# Altium PCB MCPS Power 030524.PcbDoc
Units mm, origin at the board's own origin, x right, y up, seen from the top; angles counter-clockwise.
Board outline 218.19 x 125.73 mm, 2 copper layers (Top Layer, Bottom Layer); 86 components, 40 nets, 182 pads, 14 vias.
Unrouted connection lines stored in the file: 1.
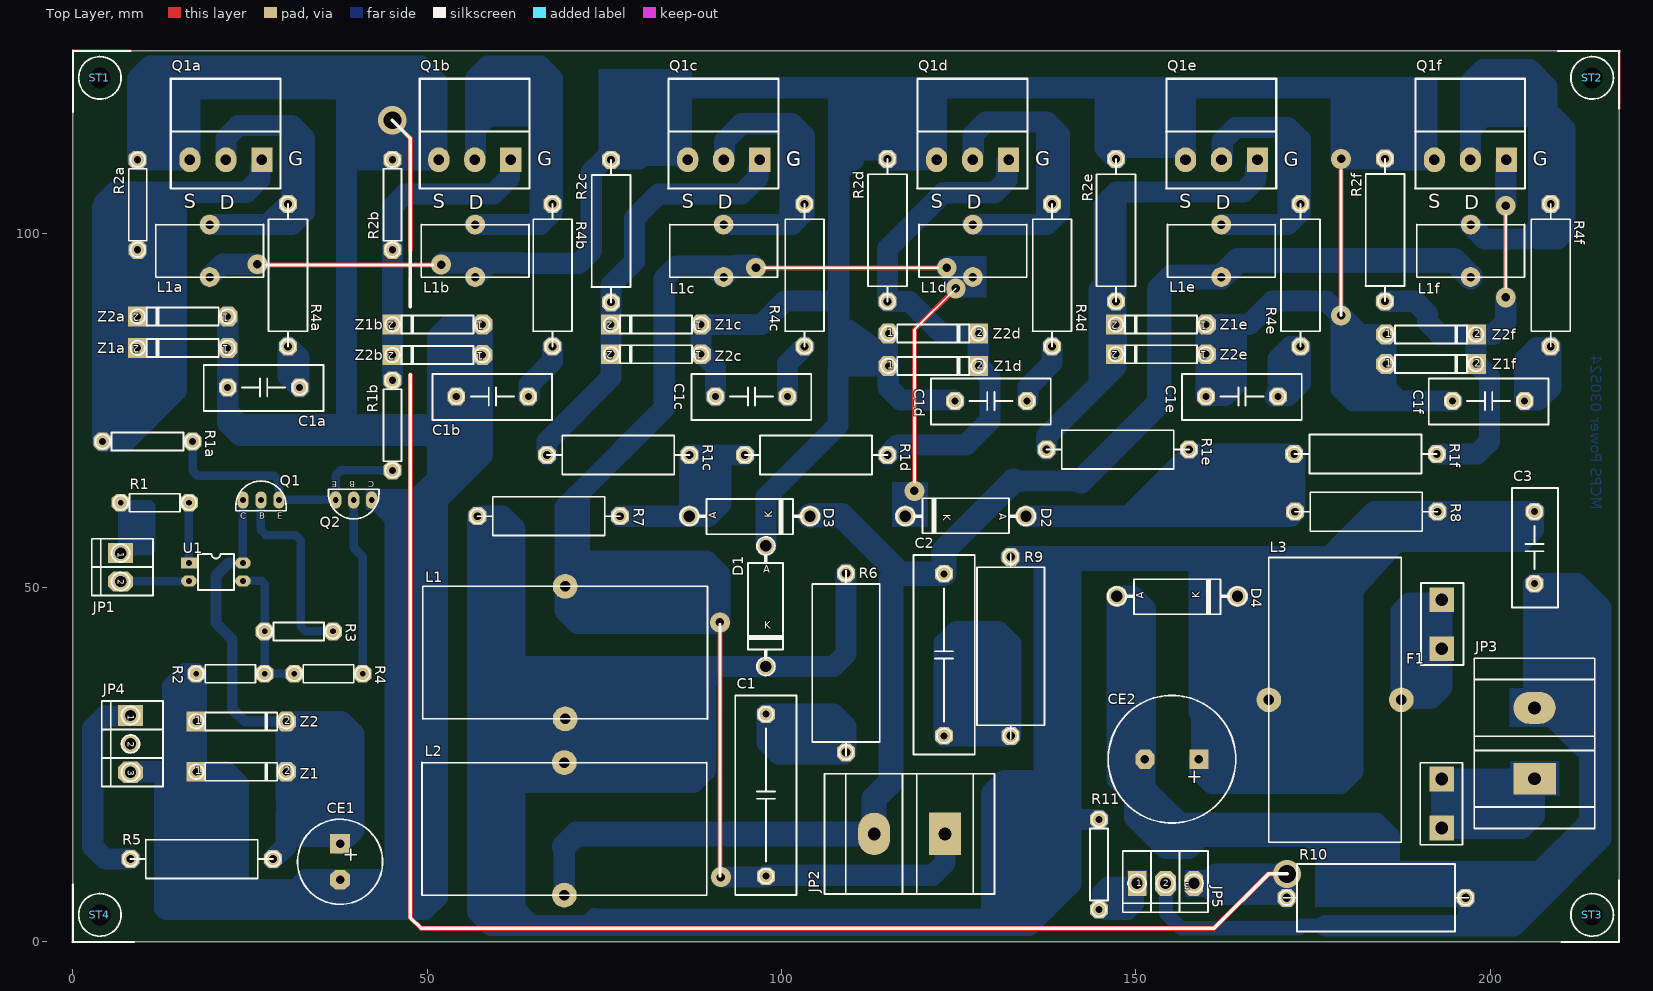
[diagram p0: Top Layer view]
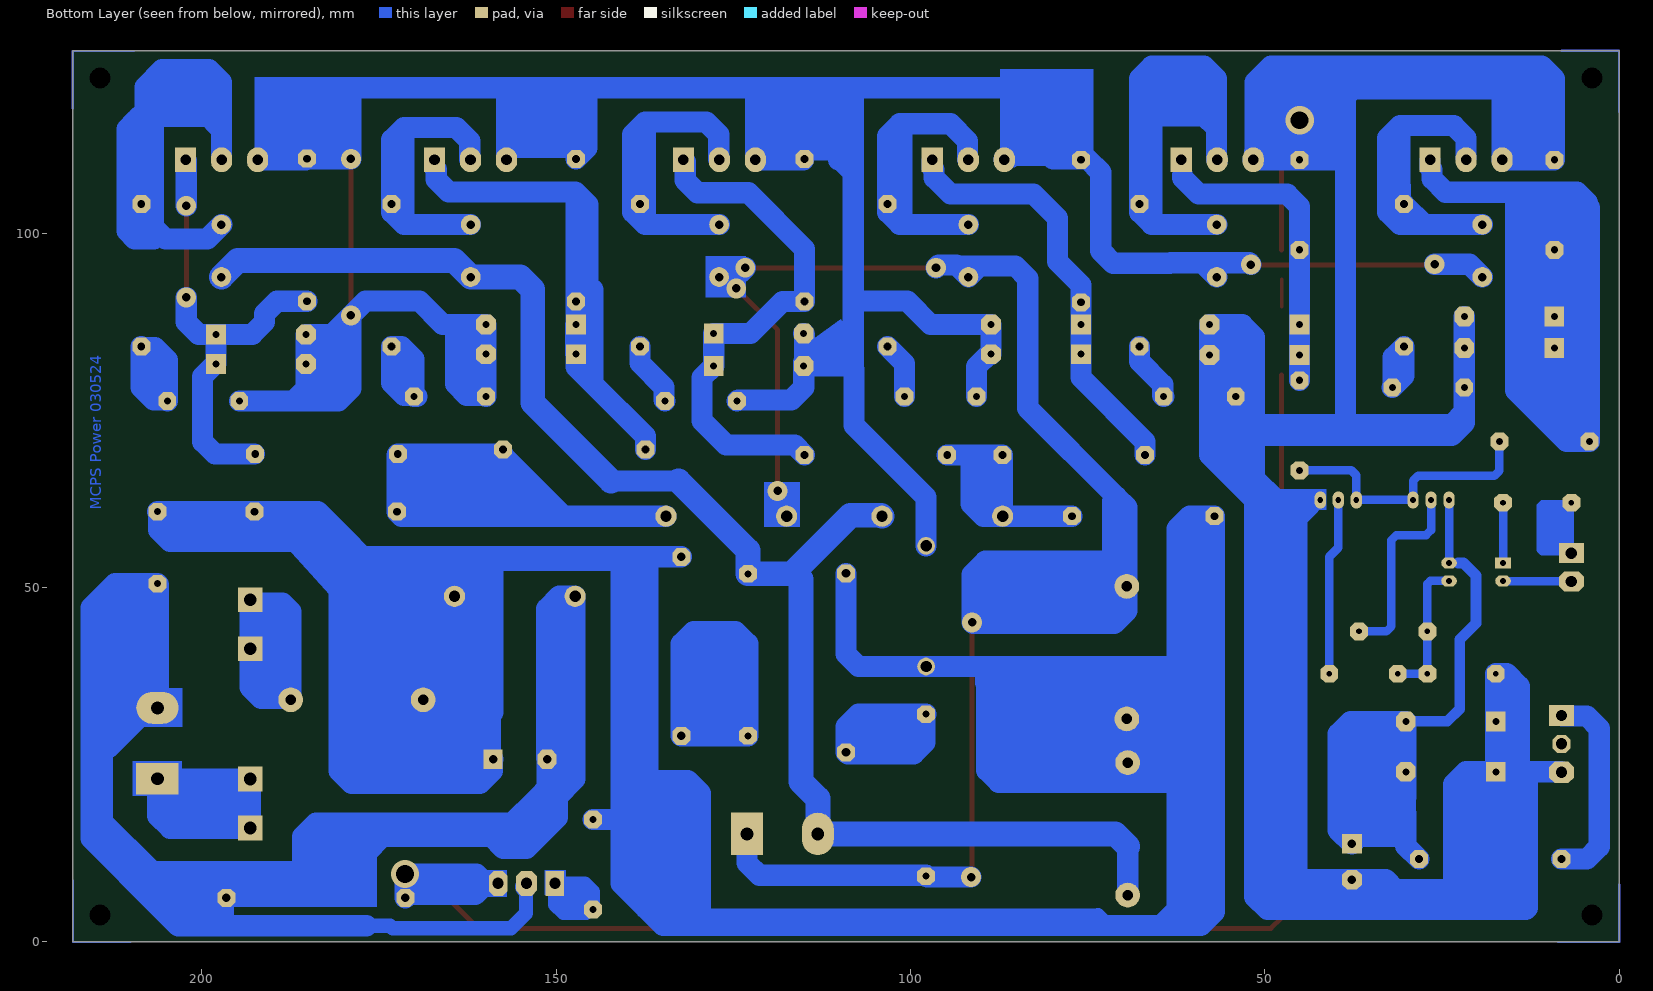
[diagram p1: Bottom Layer view, seen from below]

## Layer stack, top to bottom
Top Solder: solder mask 0.0102, Solder Resist, Dk 3.5
Top Layer: signal copper 0.0356
Dielectric1: dielectric 0.32, FR-4, Dk 4.8
Bottom Layer: signal copper 0.0356
Bottom Solder: solder mask 0.0102, Solder Resist, Dk 3.5

## Board outline
0.013,0 0.013,125.73 218.199,125.73 218.199,0

## Design rules (kind name [scope] priority, off if disabled: settings)
Clearance [All] p1: gap=0.3 ignorepadtopadclearanceinfootprint=FALSE except(1.3: Arc-Arc Arc-Track Track-Track)
ComponentClearance [All] p1 off: gap=0.254 collisioncheckmode=3 verticalgap=0.254 showdistances=FALSE
PolygonConnect [All] p1: connectstyle=Direct reliefconductorwidth=1 reliefentries=4 polygonreliefangle="90 Angle" airgapwidth=0.3
RoutingVias [All] p1: holewidth=0.711 width=1.27 viastyle="Through Hole" minholewidth=0.711 minwidth=1.27 maxholewidth=0.711 maxwidth=1.27
SilkToSolderMaskClearance SilkscreenOverComponentPads [IsPad] p1: minsilkscreentomaskgap=0.254 clearancetoexposedcopper=TRUE
SolderMaskExpansion [All] p1: expansion=0.102 istentingtop=FALSE
UnRoutedNet [All] p1: checkbadconnections=TRUE
Width [All] p1: maxlimit=5 minlimit=0.3 preferedwidth=0.7 minimp=50.000000 maximp=50.000000 favimp=50.000000
27 further rules are at their usual default settings.

## Components (designator, comment, footprint, x,y, rotation, side; value= is the part's Value field where it differs from the comment)
C1 "100N/1K" C100N 97.803,20.701 r0 top locked
C1a "220N/400" C4P 26.937,78.232 r270 top locked
C1b "220N/400" C4P 59.195,76.962 r270 top locked
C1c "4N7/1K" C4P 95.771,76.962 r270 top locked
C1d "4N7/1K" C4P 129.553,76.327 r270 top locked
C1e "4N7/1K" C4P 164.986,76.962 r270 top locked
C1f "4N7/1K" C4P 199.784,76.327 r270 top locked
C2 "100N/1K" C100N 122.949,40.513 r180 top locked
C3 "100N/400" C4P 206.261,55.626 r0 top locked
CE1 "470M/25" cap2p12 37.744,13.843 r0 top
CE2 "100M/400" CAP3P5 158.763,25.781 r270 top locked
D1 "UF5408" D54#1 97.803,55.88 r0 top locked
D2 "UF5408" D54#2 134.506,60.071 r270 top locked
D3 "UF5408" D54#2 87.008,60.071 r90 top locked
D4 "UF5408" D54#2 147.333,48.768 r90 top locked
F1 "5A" FL 193.18,48.288 r270 top locked
JP1 "TRIG In" DSIP2 6.744,54.864 r270 top locked
JP2 "LC Out" DG55X2 123.076,15.24 r180 top locked
JP3 "DC In" DG55X2 206.261,23.02 r90 top locked
JP4 "DC IN" DSIP3#1 8.141,31.953 r0 top locked
JP5 "ISense" DSIP3#2 150.177,8.255 r90 top locked
L1 "180uH/5A" L20MHGREEN 69.482,50.165 r270 top locked
L1a "2uH/5A" LS_GREEN 19.317,101.219 r270 top locked
L1b "2uH/5A" LS_GREEN 56.782,101.219 r270 top locked
L1c "2uH/5A" LS_GREEN 91.834,101.219 r270 top locked
L1d "2uH/5A" LS_GREEN 127.013,101.219 r270 top locked
L1e "2uH/5A" LS_GREEN 162.065,101.219 r270 top locked
L1f "2uH/5A" LS_GREEN 197.244,101.219 r270 top locked
L2 "180uH/5A" L20MHGREEN 69.355,6.604 r90 top locked
L3 "20mH/5A" L20MHGREEN 187.465,34.163 r180 top locked
Q1 "BC337" CBE-BC546 29.096,62.357 r90 top locked
Q1a "" 3EDG-STR 26.708,110.388 r0 top locked
Q1b "" 3EDG-STR 61.831,110.388 r0 top locked
Q1c "" 3EDG-STR 96.954,110.388 r0 top locked
Q1d "" 3EDG-STR 132.077,110.388 r0 top locked
Q1e "" 3EDG-STR 167.201,110.388 r0 top locked
Q1f "" 3EDG-STR 202.324,110.388 r0 top locked
Q2 "BC327" CBE-BC546 37.097,62.357 r270 top locked
R1 "270R" W1/4 6.744,61.976 r0 top locked
R1a "470R" R5P 16.904,70.612 r180 top locked
R1b "470R" R5P 45.098,66.548 r90 top locked
R1c "3K3/2W" R2W 76.975,68.707 r180 top locked
R1d "3K3/2W" R2W 104.889,68.707 r0 top locked
R1e "3K3/2W" R2W 147.46,69.469 r180 top locked
R1f "3K3/2W" R2W 182.41,68.834 r0 top locked
R2 "3K3" W1/4 27.064,37.846 r180 top locked
R2a "10K" R5P 9.157,110.363 r270 top locked
R2b "10K" R5P 45.098,110.363 r270 top locked
R2c "560R/2W" R2W 75.959,100.305 r270 top locked
R2d "560R/2W" R2W 114.948,100.432 r270 top locked
R2e "560R/2W" R2W 147.206,100.432 r270 top locked
R2f "560R/2W" R2W 185.179,100.457 r270 top locked
R3 "100R" W1/4 27.064,43.815 r0 top locked
R4 "100R" W1/4 31.255,37.846 r0 top locked
R4a "22R2W" R2W 30.366,94.082 r270 top locked
R4b "22R/2W" R2W 67.704,94.082 r270 top locked
R4c "220R/2W" R2W 103.264,94.082 r270 top locked
R4d "220R/2W" R2W 138.189,94.082 r270 top locked
R4e "220R/2W" R2W 173.241,94.082 r270 top locked
R4f "220R/2W" R2W 208.547,94.082 r270 top locked
R5 "1K/2W" R2W 18.199,11.684 r180 top locked
R6 "100R/5W" R5W 109.106,39.37 r270 top locked
R7 "220R/2W" R2W 67.17,60.071 r0 top locked
R8 "220R/2W" R2W 182.512,60.706 r180 top locked
R9 "100R/5W" R5W 132.347,41.707 r270 top locked
R10 "10mR/5W" R5W 183.909,6.223 r180 top locked
R11 "1K%" R5P 144.793,4.572 r90 top locked
ST1 "STUD" CORNER 0.013,125.73 r0 top locked
ST2 "STUD" CORNER 218.199,125.73 r270 top locked
ST3 "STUD" CORNER 218.199,0 r180 top locked
ST4 "STUD" CORNER 0.013,0 r90 top locked
U1 "PC817" DIP4 16.396,53.467 r0 top locked
Z1 "16V" D5P#1 17.412,24.003 r90 top locked
Z1a "16V" D5P#2 21.857,83.82 r270 top locked
Z1b "16V" D5P#2 57.798,87.122 r270 top locked
Z1c "16V" D5P#2 88.659,87.122 r270 top locked
Z1d "16V" D5P#2 115.075,81.28 r90 top locked
Z1e "16V" D5P#2 159.906,87.122 r270 top locked
Z1f "16V" D5P#2 185.306,81.534 r90 top locked
Z2 "16V" D5P#1 17.412,31.115 r90 top locked
Z2a "16V" D5P#2 21.857,88.265 r270 top locked
Z2b "16V" D5P#2 57.798,82.804 r270 top locked
Z2c "16V" D5P#2 88.659,82.931 r270 top locked
Z2d "16V" D5P#2 115.075,85.852 r90 top locked
Z2e "16V" D5P#2 159.906,82.931 r270 top locked
Z2f "16V" D5P#2 185.306,85.725 r90 top locked

## Footprints (in the part's own frame and the unit in brackets; to place one, negate y for a bottom-side part, rotate by r counter-clockwise, add the part's x,y. Pads: shape width x height; smd on the part's side, far side on the other; paste and mask are expansions set on the pad)
3EDG-STR [mm]
  rect 3x3.5 hole 1.5: 1(-0.025,-0.025)
  oval 3x3.5 hole 1.5: 2(-5.105,-0.025) 3(-10.185,-0.025)
  silkscreen extent -12.93,-4.09 2.62,11.41
C4P [mm]
  oct 2.5x2.5 hole 1: 1(0,5.08) 2(0,-5.08)
  silkscreen extent -3.19,-8.46 3.33,8.44
C100N [mm]
  oct 2.5x2.5 hole 1: 1(0,11.43) 2(0,-11.43)
  silkscreen extent -4.32,-14.07 4.32,14.07
cap2p12 [mm]
  rect 2.8x2.8 hole 1.2: 1(-0.025,0)
  oct 2.8x2.8 hole 1.2: 2(-0.025,-5.08)
  silkscreen extent -6.02,-8.54 5.97,3.46
CAP3P5 [mm]
  rect 2.7x2.7 hole 1.2: 1(0,0.152)
  oct 2.7x2.7 hole 1.2: 2(0,-7.468)
  silkscreen extent -9,-12.66 9,5.34
CBE-BC546 [mm]
  oval 2.4x1.6 hole 0.8: 1(0,2.54) 2(0,0) 3(0,5.08)
  silkscreen extent -1.52,-1.02 2.67,6.1
CORNER [mm]
  round 2 hole 3: 1(3.81,-3.81)
  Multi-Layer lines w0.3: 0,-8.623 0,0.013 8.09,0.013
  silkscreen extent 0,-8.62 8.09,0.01
D5P#1 [mil]
  rect 110x110 hole 39.37: 1(0,0)
  oct 110x110 hole 39.37: 2(0,-500)
  silkscreen extent -50,-540 50,40
D5P#2 [mil]
  oct 110x110 hole 39.37: 1(0,0)
  rect 110x110 hole 39.37: 2(0,-500)
  silkscreen extent -50,-540 50,40
D54#1 [mm]
  round 2.5 hole 1.6: 1(0,0) 2(0,-17.018)
  silkscreen extent -2.54,-18.29 2.41,1.27
D54#2 [mm]
  round 3 hole 1.6: 1(0,0) 2(0,-17.018)
  silkscreen extent -2.54,-18.28 2.41,1.27
DG55X2 [mm]
  rect 4.5x6 hole 1.8: 1(0,0)
  oval 4.5x6 hole 1.8: 2(10,0)
  silkscreen extent -7,-8.5 17,8.5
DIP4 [mm]
  rect 2.2x1.6 hole 0.8: 1(0,0)
  oval 2.2x1.6 hole 0.8: 2(0,-2.54) 3(7.62,-2.54) 4(7.62,0)
  silkscreen extent 1.27,-3.81 6.35,1.27
DSIP2 [mm]
  rect 2.8x3.5 hole 1.6: 1(0,0)
  oct 2.8x3.5 hole 1.6: 2(4.013,0)
  silkscreen extent -2.03,-4.06 5.99,4.57
DSIP3#1 [mm]
  rect 3.5x3 hole 1.6: 1(0,0)
  oct 2.5x2.5 hole 1.6: 2(0,-4.013)
  oct 3.5x3 hole 1.6: 3(0,-8.026)
  silkscreen extent -4.06,-10.01 4.57,2.03
DSIP3#2 [mm]
  rect 3.5x2.6 hole 1.6: 1(0,0)
  oct 3.5x3 hole 1.6: 2(0,-4.013)
  oct 3.5x2.6 hole 1.6: 3(0,-8.026)
  silkscreen extent -4.06,-10.01 4.57,2.03
FL [mm]
  rect 3.5x3.5 hole 1.8: 1(0,0) 2(32.233,0) ""(6.932,0) ""(25.301,0)
  silkscreen extent -2.34,-3.05 34.57,3.05
L20MHGREEN [mm]
  round 3.5 hole 1.5: 1(18.7,0) 2(0,0)
  silkscreen extent 0,-20.1 18.7,20.1
LS_GREEN [mm]
  round 2.8 hole 1.2: 1(7.4,0) 2(0,0)
  silkscreen extent 0,-7.6 7.4,7.6
R2W [mm]
  oct 2.54x2.54 hole 1.1: 1(-10.058,0) 2(10.058,0)
  silkscreen extent -11.07,-2.75 11.07,2.76
R5P [mm]
  oct 2.54x2.54 hole 1: 1(0,0) 2(12.7,0)
  silkscreen extent -1.02,-1.27 13.71,1.27
R5W [mm]
  oct 2.54x2.54 hole 1.2: 1(-12.624,0) 2(12.624,0)
  silkscreen extent -13.64,-4.75 13.64,4.75
W1/4 [mm]
  oct 2.5x2.5 hole 0.8: 1(0,0) 2(9.652,0)
  silkscreen extent -1.01,-1.27 10.67,1.27

## Part data
C1 C1a C1b C1c C1d C1e C1f C2 C3: library part C
CE1 CE2: library part E
D1 D2 D3 D4: library part D
F1: library part FUSE1
JP1 JP2 JP3: library part "Header 2", "Header, 2-Pin", LatestRevisionDate=17-Jul-2002, LatestRevisionNote="Re-released for DXP Platform.", Publisher="Altium Limited"
JP4 JP5: library part "Header 3", "Header, 3-Pin", LatestRevisionDate=17-Jul-2002, LatestRevisionNote="Re-released for DXP Platform.", Publisher="Altium Limited"
L1 L1a L1b L1c L1d L1e L1f L2 L3: library part INDUCTOR
Q1: library part BC546
Q1a Q1b Q1c Q1d Q1e Q1f: library part "MOSFET N"
Q2: library part M6, "PNP", DatasheetVersion=1997, LatestRevisionDate=15-Jan-2003, LatestRevisionNote="PCB Footprint 'BCY-W3/D4.7' replaced", PackageDescription="TO, Flat Index; 3 In-Line, Axial Leads; Body Dia. 4.5mm; Leads 0.51 x 0.48 mm (max)", PackageReference=TO-92A, PackageVersion=Sep-1998, Published=8-Jun-2000, Publisher="Altium Limited"
R1 R1a R1b R1c R1d R1e R1f R2 R2a R2b R2c R2d R2e R2f R3 R4 R4a R4b R4c R4d R4e R4f R5 R6 R7 R8 R9 R10 R11: library part R
U1: library part OPTODIP4
Z1 Z1a Z1b Z1c Z1d Z1e Z1f Z2 Z2a Z2b Z2c Z2d Z2e Z2f: library part DZ

## Via types
v1: diameter 2.8, hole 1.2, Top Layer to Bottom Layer, 12 vias
v2: diameter 4, hole 2.5, Top Layer to Bottom Layer, 2 vias

## Nets (pads, with @x,y where several pads share a name; then routed paths per layer and width w, separated by ;. In a path a pad name is that pad's centre, name@x,y a point inside that pad or via, vN(x,y) a via of type N, cw(c..) or ccw(c..) an arc to the next point about the centre after c; other vN are vias at no path point)
16V: CE1.1 Q1.3 R5.1 U1.4 Z1.2 Z2.2 | length 103.8
  Bottom Layer w1.2: U1.4 Q1.3
  Bottom Layer w1.5: 22.746,53.467 21.963,53.467 20.206,51.71 20.206,44.958 22.492,42.672 22.492,32.872 24.249,31.115 Z2.2
  Bottom Layer w3: R5.1 30.112,13.538 30.112,16.007 30.112,18.161 ; 30.112,14.859 36.703,14.859 CE1.1 39.637,15.761 39.637,16.912 ; 39.637,16.912 39.637,29.358 37.879,31.115 Z2.2 Z1.2 30.112,20.426 31.869,18.669 37.879,18.669 39.637,16.912
COM: C3.2 CE2.2 D4.1 JP3.2 JP5.2 R10.1 | length 398.9
  Bottom Layer w2: JP5.2@154.278,7.789 154.278,4.043 156.399,1.923 173.066,1.923 173.429,2.286 176.784,2.286
  Bottom Layer w3: 152.654,20.179 152.654,20.32 ; JP5.2 154.191,7.876 JP5.2@154.278,7.789 ; 176.784,2.286 203.34,2.286 207.277,6.223 ; 185.293,9.906 180.299,9.906 176.784,6.391 176.784,12.573 174.498,14.859 159.131,14.859 ; 185.801,10.414 185.801,14.859 183.896,16.764 156.21,16.764 152.654,20.32 ; 186.179,9.02 187.066,9.906 207.01,9.906 ; R10.1 207.277,6.223 ; 209.944,9.906 207.01,9.906 ; 147.333,27.538 147.333,22.987 149.86,20.46 149.86,17.539 154.191,13.208 ; 147.333,27.538 149.09,25.781 CE2.2 ; 147.333,27.538 147.333,36.83 ; 147.333,36.83 151.319,32.844 ; 147.333,36.83 D4.1 149.562,48.768 151.319,47.011 151.319,32.844 ; CE2.2 151.295,21.679 152.654,20.32 ; CE2.2 151.295,25.864 151.319,25.888 151.319,32.844 ; 154.191,13.208 157.48,13.208 159.131,14.859 ; 154.191,13.208 155.842,14.859 159.131,14.859 ; JP3.2 211.468,33.02 214.008,30.48 ; JP3.2 207.531,33.02 213.119,27.432 214.008,27.432 ; JP3.2 206.134,33.147 206.134,50.419 C3.2 212.25,50.546 214.008,48.789 ; 207.01,9.906 214.008,16.904 ; 207.277,6.223 214.008,12.954 ; 214.008,12.954 214.008,16.904 ; 214.008,12.954 215.646,14.592 215.646,47.15 214.008,48.789 ; 214.008,16.904 214.008,27.432 ; 214.008,27.432 214.008,30.48 ; 214.008,30.48 214.008,48.789
DRN2: C1.2 D2.2 JP2.1 L1.2 L1c.1 L1d.1 | length 264.7
  Top Layer w0.7: v1(91.326,45.085) 91.326,9.271 v1(91.453,9.144) ; v1(96.406,95.123) v1(123.33,95.123) ; v1(118.758,63.627) 118.758,86.36 v1(124.6,92.202)
  Bottom Layer w3: v1(91.453,9.144) 97.652,9.144 97.803,9.295 97.803,9.398 121.318,9.398 123.076,11.155 JP2.1@123.076,12.573 ; v1(96.406,95.123) 96.014,95.514 93.529,95.514 93.392,95.377 ; v1(123.33,95.123) 125.054,93.399 126.592,93.399 L1d.1 ; 69.482,53.721 71.514,53.721 ; 69.482,53.721 L1.2 69.482,46.736 71.26,44.958 91.199,44.958 v1(91.326,45.085) 91.326,51.837 89.441,53.721 71.514,53.721 ; 69.482,53.721 69.482,61.341 70.942,62.801 ; 70.942,62.801 71.514,62.23 71.514,53.721 ; 70.942,62.801 83.452,75.311 83.452,93.62 85.209,95.377 90.276,95.377 ; 90.276,95.377 93.392,95.377 ; 90.276,95.377 L1c.1 93.392,95.377
DRN3: C2.2 D3.2 JP2.2 L1e.1 L1f.1 L2.2 | length 217.1
  Bottom Layer w3: L2.2 69.355,13.483 ; 132.728,65.024 142.253,65.024
  Bottom Layer w3.5: 69.355,13.483 71.112,15.24 JP2.2 113.076,20.239 115.456,22.619 115.456,51.181 116.218,51.943 C2.2 122.949,55.245 132.728,65.024 ; D3.2 104.153,60.198 108.471,60.198 116.726,51.943 ; 142.253,65.024 153.302,76.073 153.302,92.062 155.059,93.819 L1e.1 164.385,96.139 194.924,96.139 L1f.1
GND: C1a.2 C1b.2 CE1.2 JP4.3 JP5.3 Q1a.3 Q1b.3 Q2.3 R2.2 R2a.1 R2b.1 R10.2 Z1.1 Z1a.1 Z1b.1 Z2.1 Z2a.1 Z2b.1 | length 899.3
  Top Layer w0.7: v2(45.098,115.951) 47.625,113.424 47.625,97.663 ; 47.625,80.01 47.625,3.429 49.149,1.905 161.036,1.905 168.719,9.588 v2(171.336,9.588)
  Bottom Layer w1.2: Q2.3 45.479,62.357
  Bottom Layer w2.5: JP5.3@158.38,8.255 159.906,8.255 166.002,8.255 166.435,7.822
  Bottom Layer w3: JP4.3 8.217,24.003 14.364,24.003 ; Q1a.3 Q1a.3@16.523,110.594 ; 18.315,123.098 16.523,121.306 16.523,120.396 ; 19.939,6.731 20.592,7.384 23.381,7.384 ; Z2a.1 Z1a.1 C1a.2 21.857,74.782 ; 38.159,119.807 38.748,120.396 ; 38.621,119.761 38.621,110.363 ; 38.748,119.507 51.011,119.507 ; 43.701,61.595 45.479,59.817 ; 45.479,62.357 45.479,59.817 ; 46.431,62.42 48.463,62.42 51.448,65.405 ; 48.654,62.357 51.448,62.357 ; 51.223,119.295 51.392,119.126 ; Q1b.3@51.493,110.49 51.454,110.529 51.454,111.486 51.392,111.549 51.392,119.126 ; Q1b.3 R2b.1 38.621,110.363 ; C1b.2 54.115,73.025 ; C1b.2@54.266,77.113 56.04,77.113 57.798,78.87 ; 167.526,6.731 161.43,6.731 159.906,8.255 161.239,9.588 v2(171.336,9.588) 171.285,9.538 R10.2 ; 167.872,6.731 R10.2@170.777,6.731 ; 14.364,24.003 Z1.1 ; 14.364,24.003 12.967,22.606 12.967,4.774 13.169,4.572 19.169,4.572 ; 14.364,24.003 14.122,24.245 14.122,36.089 15.879,37.846 R2.2 Z2.1 Z1.1 ; Q1a.3@16.523,110.594 16.292,110.363 R2a.1 9.157,121.814 10.914,123.571 38.748,123.571 ; Q1a.3@16.523,110.594 16.523,120.396 ; 16.523,120.396 38.748,120.396 ; Z1.1 17.412,6.329 19.169,4.572 ; Z1.1 21.623,24.003 23.381,22.246 23.381,7.384 ; 19.169,4.572 23.381,4.572 ; 21.857,74.782 23.614,73.025 38.621,73.025 ; 21.857,74.782 21.857,73.258 23.614,71.501 50.711,71.501 ; 23.381,4.572 23.381,7.384 ; 23.381,4.572 43.721,4.572 ; 23.381,7.384 31.568,7.384 32.947,8.763 CE1.2 44.971,8.763 45.479,9.271 ; 38.621,73.025 38.621,110.363 ; 38.621,73.025 51.448,73.025 ; 38.748,120.396 38.748,123.571 ; 38.748,123.571 49.126,123.571 51.392,121.306 51.392,119.126 ; 43.721,4.572 45.479,6.329 45.479,9.271 ; 43.721,4.572 49.636,4.572 51.448,6.384 51.448,62.357 ; 45.479,9.271 45.479,59.817 ; 50.711,71.501 50.711,72.289 51.448,73.025 ; 50.711,71.501 51.448,71.501 ; 51.448,62.357 51.448,65.405 ; 51.448,62.357 54.115,65.024 ; 51.448,65.405 51.448,71.501 ; 51.448,71.501 54.115,71.501 ; 51.448,71.501 51.448,73.025 ; 51.448,73.025 51.448,85.365 53.205,87.122 Z1b.1 Z2b.1 57.798,78.87 ; 51.448,73.025 54.115,73.025 ; 54.115,65.024 57.798,68.707 57.798,78.87 ; 54.115,65.024 54.115,71.501 ; 54.115,71.501 54.115,73.025
GT1: Q1.2 Q2.2 R1a.1 R1b.1 | length 39.4
  Bottom Layer w1.2: R1a.1 16.904,66.489 17.614,65.779 28.386,65.779 29.096,65.069 Q1.2 Q2.2 37.097,65.845 37.8,66.548 R1b.1
GT2: D3.1 R1c.1 R1d.1 R7.2 | length 38.3
  Bottom Layer w3: R7.2 D3.1 ; R1d.1 91.453,68.707 ; D3.1 89.695,60.071 91.453,61.828 91.453,68.707 ; D3.1 87.008,68.682 R1c.1 91.453,68.707
GT3: D2.1 R1e.1 R1f.1 R8.2 | length 72.9
  Bottom Layer w3: D2.1 148.984,60.071 ; R1e.1@157.518,68.605 153.157,64.244 148.984,60.071 ; R1e.1@157.518,68.834 R1f.1 172.479,68.707 172.479,61.214 R8.2@172.428,61.163 ; R8.2 171.818,60.071 154.324,60.071 148.984,60.071
HV: C3.1 CE2.1 D1.2 D4.2 L1.1 L2.1 L3.1 R6.1 R7.1 R8.1 R9.1 R11.2 | length 736.9
  Bottom Layer w2: 72.04,2.304 73.546,3.81
  Bottom Layer w3: 60.592,22.987 61.1,22.479 62.37,22.479 ; L1.1 L1.1@69.418,31.401 ; R6.1 109.106,40.619 107.348,38.862 D1.2 89.421,38.862 ; R9.1 137.097,54.331 ; R11.2 140.856,17.272 ; CE2.1 CE2.1@158.966,25.73 ; 158.915,32.406 158.915,54.102 ; 177.051,52.602 177.051,54.115 177.267,54.331 ; 177.051,54.331 162.593,54.331 ; 57.112,24.638 57.778,25.304 59.639,25.304 62.37,25.304 ; 57.112,24.638 R7.1 60.612,60.071 62.37,58.314 62.37,38.862 ; 57.112,24.638 57.112,4.242 59.05,2.304 64.617,2.304 ; 62.37,22.479 87.536,22.479 89.294,24.236 89.294,36.449 89.421,36.576 89.421,38.862 ; 62.37,22.479 62.37,25.304 ; 62.37,22.479 62.37,4.551 64.617,2.304 ; 62.37,25.304 62.37,31.242 ; 62.37,25.304 L2.1 69.418,25.368 L1.1@69.418,31.401 ; 62.37,31.242 68.552,31.242 68.583,31.274 69.29,31.274 L1.1@69.418,31.401 ; 62.37,31.242 62.37,38.862 ; 62.37,38.862 89.421,38.862 ; 64.617,2.304 72.04,2.304 101.613,2.304 128.791,2.304 ; 128.791,2.304 134.905,2.304 136.538,3.937 137.363,4.763 ; 128.791,2.304 129.68,3.193 129.68,20.976 131.437,22.733 135.954,22.733 137.097,21.59 ; 137.097,21.59 137.097,22.733 137.097,54.331 ; 137.097,21.59 137.097,5.029 137.363,4.763 ; 137.097,54.331 140.856,54.331 140.856,30.416 140.856,17.272 ; 137.363,4.763 140.856,8.255 140.856,17.272 ; 158.915,54.102 162.822,54.102 ; 158.915,54.102 159.144,54.331 162.593,54.331 ; CE2.1@158.966,25.73 159.271,26.035 159.271,32.406 161.028,34.163 L3.1 ; CE2.1@158.966,25.73 159.017,25.679 159.017,24.109 160.774,22.352 178.849,22.352 180.607,24.109 180.607,50.927 ; 162.593,54.331 162.822,54.102 ; 162.822,54.102 164.351,52.573 D4.2 167.134,48.768 ; 167.134,48.768 175.273,48.768 ; 167.134,48.768 168.765,47.138 L3.1 ; L3.1 173.515,34.163 175.273,32.406 175.273,48.768 ; 175.273,48.768 178.448,48.768 180.607,50.927 ; 177.267,54.331 180.029,57.093 182.315,59.379 183.642,60.706 R8.1 C3.1 206.11,60.555 206.11,58.121 204.503,56.515 185.133,56.515 180.607,56.515 180.607,54.61 ; 177.267,54.331 180.327,54.331 180.607,54.61 ; 180.607,50.927 180.607,54.61
  Bottom Layer w3.5: 140.856,54.102 158.915,54.102
NetC1_1: C1.1 R6.2 | length 31.6
  Bottom Layer w3: C1.1 107.348,32.131 109.106,30.374 R6.2 109.055,26.746 108.852,26.543 99.56,26.543 97.954,28.149 97.954,31.98 C1.1
NetC1a_1: C1a.1 R4a.2 | length 12.7
  Bottom Layer w3: C1a.1 C1a.1@31.866,78.383 ; C1a.1@31.866,78.383 30.366,79.883 R4a.2 31.866,82.523 C1a.1@31.866,78.383
NetC1b_1: C1b.1 R4b.2 | length 8.5
  Bottom Layer w3: C1b.1 64.426,77.113 64.426,78.65 67.704,81.928 R4b.2
NetC1c_1: C1c.1 R4c.2 | length 8.1
  Bottom Layer w3: C1c.1 100.851,81.61 R4c.2
NetC1d_1: C1d.1 R4d.2 | length 9.2
  Bottom Layer w3: C1d.1 134.784,76.478 134.784,78.269 138.189,81.674 R4d.2
NetC1e_1: C1e.1 R4e.2 | length 18.7
  Bottom Layer w3: C1e.1@169.685,76.962 169.836,77.113 171.483,77.113 173.241,78.87 173.241,80.645 R4e.2 171.823,84.023 170.066,82.266 C1e.1
NetC1f_1: C1f.1 R4f.2 | length 20.3
  Bottom Layer w3: R4f.2@208.396,83.872 206.621,83.872 204.864,82.115 C1f.1 205.015,76.478 206.789,76.478 208.547,78.235 R4f.2
NetC2_1: C2.1 R9.2 | length 46.2
  Bottom Layer w3: C2.1 122.949,42.058 124.706,43.815 130.589,43.815 132.347,42.058 R9.2 C2.1
NetF1_1: F1.1 F1.@193.18,41.356 L3.2 | length 37.6
  Bottom Layer w3: L3.2 L3.2@187.56,34.259 ; L3.2@187.56,34.259 187.656,34.354 191.614,34.354 193.18,35.92 193.18,41.356 F1.1 192.68,47.788 188.623,47.788 187.465,46.63 187.465,34.354 L3.2@187.56,34.259
NetF1_2: F1.2 F1.@193.18,22.987 JP3.1 | length 39.7
  Bottom Layer w3: JP3.1@205.642,23.003 206.244,23.003 JP3.1 ; JP3.1@205.642,23.003 193.196,23.003 193.18,22.987 F1.2 204.503,16.055 206.261,17.812 JP3.1 ; JP3.1@205.642,23.003 205.753,23.114 205.847,23.02 JP3.1
NetJP1_1: JP1.1 R1.1 | length 23.4
  Bottom Layer w0.7: 8.268,56.388 8.395,56.515 8.776,56.515 ; JP1.1 10.906,54.864 11.316,55.274 11.316,61.566 10.906,61.976 R1.1 JP1.1
NetJP1_2: JP1.2 U1.2 | length 9.7
  Bottom Layer w1.2: JP1.2 6.782,50.889 16.358,50.889 U1.2
NetJP4_1: JP4.1 R5.2 | length 28.8
  Bottom Layer w3: R5.2 4.564,11.684 2.807,13.441 2.807,30.108 4.564,31.866 8.053,31.866 JP4.1
NetL1a_2: L1a.2 Q1a.2 R4a.1 | length 61.1
  Bottom Layer w3: L1a.2 27.522,101.219 ; Q1a.2@21.603,110.613 21.603,113.45 23.36,115.207 30.894,115.207 30.983,115.119 ; 27.522,101.219 30.894,101.219 ; 27.522,101.219 30.366,104.063 R4a.1 R4a.1@30.894,104.669 ; 30.894,101.219 32.652,102.976 32.652,106.426 ; 30.894,101.219 R4a.1@30.894,104.669 ; R4a.1@30.894,104.669 32.652,106.426 ; R4a.1@30.894,104.669 30.894,106.625 30.983,106.713 30.983,115.119 ; 30.983,115.119 32.652,113.45 32.652,106.426
NetL1b_2: L1b.2 Q1b.2 R4b.1 | length 82
  Bottom Layer w3: Q1b.2@56.726,110.338 56.821,110.433 56.821,114.829 ; L1b.2 65.946,101.219 ; 56.821,114.829 56.821,121.814 58.579,123.571 65.946,123.571 67.704,121.814 67.704,114.829 ; 56.821,114.829 58.579,116.586 65.946,116.586 ; 65.946,101.219 65.946,116.586 ; 65.946,101.219 67.704,102.976 R4b.1 67.704,114.829 ; 65.946,116.586 67.704,114.829
NetL1c_2: L1c.2 Q1c.2 R4c.1 | length 52.9
  Bottom Layer w3: L1c.2 101.506,101.219 103.264,102.976 R4c.1 103.264,113.686 101.506,115.443 94.364,115.443 91.945,113.023 91.945,110.433 Q1c.2@91.849,110.338 ; 101.232,101.219 101.232,115.443
NetL1d_2: L1d.2 Q1d.2 R4d.1 | length 60.7
  Bottom Layer w3: L1d.2@126.957,101.219 L1d.2 136.431,101.219 ; Q1d.2@126.972,110.338 127.068,110.433 127.068,113.94 128.825,115.697 137.447,115.697 ; 136.431,101.219 137.447,102.235 ; 136.431,101.219 137.447,101.219 ; 137.447,101.219 137.447,102.235 ; 137.447,101.219 139.205,102.976 139.205,105.156 ; 137.447,102.235 138.189,102.976 R4d.1 139.205,105.156 ; 137.447,102.235 137.447,115.697 ; 137.447,115.697 139.205,113.94 139.205,105.156
NetL1e_2: L1e.2 Q1e.2 R4e.1 | length 51.1
  Bottom Layer w3: L1e.2@162.08,101.219 171.483,101.219 ; Q1e.2@162.095,110.338 162.191,110.433 162.191,113.023 164.103,114.935 171.483,114.935 ; 171.483,101.219 171.483,114.935 ; 171.483,101.219 173.241,102.976 R4e.1 173.241,113.178 171.483,114.935
NetL1f_2: L1f.2 Q1f.2 R4f.1 | length 105.4
  Bottom Layer w3: L1f.2@197.203,101.219 199.235,99.187 205.118,99.187 206.876,100.944 206.876,116.459 ; Q1f.2 197.218,121.306 198.976,123.063 205.626,123.063 208.039,120.65 208.039,116.459 ; 197.752,115.139 199.071,116.459 206.876,116.459 ; R4f.1 208.547,100.965 206.769,99.187 209.458,99.187 210.579,100.307 210.579,114.702 209.606,115.674 208.821,116.459 206.876,116.459 ; R4f.1@208.633,103.958 208.633,115.91 209.002,116.279
NetQ1_1: Q1.1 R3.2 | length 27.5
  Bottom Layer w1.2: Q1.1 26.556,58.107 27.259,57.404 31.441,57.404 32.144,56.701 32.144,44.518 32.847,43.815 R3.2
NetQ1a_1: Q1a.1 R1a.2 R2a.2 Z1a.2 Z2a.2 | length 135.4
  Bottom Layer w3: Q1a.1@26.683,110.338 26.683,109.234 26.433,108.984 26.433,107.7 24.524,105.791 14.618,105.791 ; 9.157,72.369 12.596,75.809 14.618,77.83 14.618,105.791 ; 9.157,72.369 Z1a.2 Z2a.2 R2a.2 9.157,104.034 10.914,105.791 ; 9.157,72.369 7.399,70.612 R1a.2 4.204,103.632 4.458,103.886 4.458,104.306 5.943,105.791 10.914,105.791 ; 10.914,105.791 14.618,105.791
NetQ1b_1: Q1b.1 R1b.2 R2b.2 Z1b.2 Z2b.2 | length 45.3
  Bottom Layer w1.2: 61.608,108.204 61.608,110.139 Q1b.1@61.806,110.338
  Bottom Layer w3: R1b.2 Z2b.2 Z1b.2 R2b.2 45.098,103.78 46.855,105.537 59.322,105.537 61.608,107.823 61.608,108.204
NetQ1c_1: Q1c.1 R1c.2 R2c.2 Z1c.2 Z2c.2 | length 60.8
  Bottom Layer w3: R1c.2 66.916,70.587 75.959,79.629 Z2c.2 Z1c.2 75.959,89.662 R2c.2 75.959,92.71 79.261,96.012 79.261,102.129 82.651,105.519 94.356,105.519 96.679,107.842 96.679,108.984 96.929,109.234 Q1c.1@96.929,110.236
NetQ1d_1: Q1d.1 R1d.2 R2d.2 Z1d.2 Z2d.2 | length 75.4
  Bottom Layer w3: R1d.2 116.345,70.104 125.997,70.104 129.426,73.533 129.426,79.629 Z1d.2 Z2d.2 122.568,85.852 118.046,90.373 R2d.2 114.948,97.79 122.877,105.719 130.045,105.719 131.802,107.476 131.802,110.088 Q1d.1@132.052,110.338
NetQ1e_1: Q1e.1 R1e.2 R2e.2 Z1e.2 Z2e.2 | length 93.7
  Bottom Layer w3: R1e.2 137.401,71.349 144.793,78.74 ; 144.793,92.024 144.793,87.122 144.793,78.74 ; Q1e.1@167.175,110.338 167.175,109.234 166.925,108.984 166.925,107.566 165.168,105.809 147.312,105.809 147.206,105.703 ; 144.793,78.74 147.206,81.153 Z2e.2 147.24,82.966 147.24,87.087 Z1e.2 R2e.2 ; R2e.2 145.555,92.024 145.555,104.052 147.206,105.703 ; R2e.2 147.206,105.703
NetQ1f_1: Q1f.1 R1f.2 R2f.2 Z1f.2 Z2f.2 | length 67.3
  Top Layer w0.7: v1(202.197,90.932) v1(202.197,103.886)
  Bottom Layer w3: R2f.2 189.39,90.399 191.148,88.641 191.148,87.482 192.905,85.725 Z2f.2 ; R1f.2@192.572,68.834 198.153,68.834 199.911,70.591 199.911,79.777 198.153,81.534 Z1f.2 Z2f.2 ; v1(202.197,90.932) 202.197,87.482 200.439,85.725 Z2f.2 ; v1(202.197,103.886) 202.197,110.236 Q1f.1@202.298,110.338
NetQ2_1: Q2.1 R4.2 | length 25
  Bottom Layer w1.2: Q2.1 39.637,55.626 40.907,54.356 R4.2
NetR1_2: R1.2 U1.1 | length 8.5
  Bottom Layer w1.2: U1.1 R1.2
NetR2_1: R2.1 R3.1 R4.1 U1.3 | length 20.1
  Bottom Layer w1.2: U1.3 26.654,50.927 27.064,50.517 R3.1 R2.1 R4.1
PGND: C1c.2 C1d.2 C1e.2 C1f.2 D1.1 L1a.1 L1b.1 Q1c.3 Q1d.3 Q1e.3 Q1f.3 R2c.1 R2d.1 R2e.1 R2f.1 Z1c.1 Z1d.1 Z1e.1 Z1f.1 Z2c.1 Z2d.1 Z2e.1 Z2f.1 | length 508.5
  Top Layer w0.7: v1(26.048,95.631) 26.175,95.504 51.885,95.504 v1(51.962,95.581) ; v1(178.956,88.392) v1(178.956,110.49)
  Bottom Layer w3: L1a.1 21.129,95.631 v1(26.048,95.631) ; v1(51.962,95.581) 52.213,95.832 63.312,95.832 63.386,95.758 71.407,95.758 73.165,97.515 73.165,108.606 75.049,110.49 79.769,110.49 ; L1b.1 58.721,95.758 ; Q1c.3 86.769,110.478 86.538,110.709 85.82,110.709 85.53,110.998 80.386,110.998 79.878,110.49 79.769,110.49 ; C1c.2 90.691,81.174 88.933,82.931 Z2c.1 Z1c.1 97.168,87.122 100.47,90.424 108.09,90.424 ; D1.1 97.803,62.738 107.963,72.898 107.963,80.793 108.45,81.28 ; 110.126,112.264 110.126,110.338 109.847,110.338 108.09,108.58 ; Z2d.1 114.948,85.725 114.948,81.915 115.075,81.788 Z1d.1 ; R2d.1@115.1,110.338 121.892,110.338 Q1d.3 121.892,120.523 ; C1d.2 124.322,76.478 116.832,76.478 115.075,78.235 Z1d.1 ; R2e.1 145.682,112.014 145.682,120.523 ; Q1e.3 157.015,120.523 ; 191.008,120.523 178.956,120.523 ; Q1f.3 192.138,110.338 185.356,110.338 R2f.1 179.743,110.515 179.718,110.49 v1(178.956,110.49) 178.956,120.523 ; C1f.2 187.063,76.327 ; 79.769,110.49 79.769,120.523 108.217,120.523 ; 108.09,90.424 108.09,88.519 108.09,81.64 108.45,81.28 ; 108.09,90.424 108.09,108.58 ; 108.09,108.58 108.09,120.396 108.217,120.523 ; 108.217,120.523 121.892,120.523 ; 108.45,81.28 Z1d.1 ; 121.892,120.523 145.682,120.523 ; 145.682,120.523 157.015,120.523 ; 157.015,120.523 178.956,120.523 ; 164.224,87.122 Z1e.1 Z2e.1 C1e.2 160.057,77.113 162.617,77.113 164.224,78.719 164.224,87.122 ; 164.224,87.122 166.002,87.122 169.304,90.424 176.924,90.424 v1(178.956,88.392) ; v1(178.956,88.392) 178.956,78.084 180.713,76.327 187.063,76.327 ; v1(178.956,88.392) 181.623,85.725 Z2f.1 Z1f.1 185.306,78.084 187.063,76.327
VS: JP5.1 R11.1 | length 17.5
  Bottom Layer w2: R11.1 145.013,4.351 145.504,4.351 145.791,4.064 148.955,4.064 150.127,5.236 150.127,8.204 JP5.1 145.964,8.255 144.793,7.083 R11.1
pads on no net: JP4.2 ST1.1 ST2.1 ST3.1 ST4.1
copper on no net: | length 3.8
  Top Layer w0.5: 47.625,89.662 47.625,93.472

## Other copper
Bottom Layer:
  rectangle net 16V: 28.702,16.256 32.059,24.003
  rectangle net COM: 150.114,16.002 152.908,19.812
  rectangle net COM: 195.453,2.794 204.597,6.604
  rectangle net COM: 175.26,4.953 199.771,8.89
  rectangle net NetC1e_1: 170.815,78.105 172.974,83.185
  rectangle net NetC1f_1: 205.613,77.47 207.772,82.55
  region net HV: 181.324,48.234 188.627,56.329 184.953,59.643 177.651,51.548
  rectangle net COM: 147.955,21.336 150.368,24.638
  rectangle net COM: 152.146,14.605 155.448,18.542
  rectangle net COM: 176.022,9.652 184.912,15.494
  rectangle net 16V: 29.273,14.361 38.227,17.653
  rectangle net GND: 31.369,5.08 44.704,7.747
  rectangle net DRN2: 115.583,58.547 120.663,64.897
  rectangle net DRN2: 123.203,90.932 128.918,96.774
  rectangle net VS: 148.603,6.604 151.651,10.16
  rectangle net GND: 156.934,6.35 159.906,10.16
  rectangle net NetL1f_2: 198.387,117.094 207.15,122.555
  rectangle net NetL1b_2: 57.925,117.221 66.815,122.174
  rectangle net HV: 73.546,2.667 129.68,4.699
  rectangle net GT2: 88.278,60.579 91.199,67.945
  rectangle net NetF1_2: 202.832,20.574 209.817,25.527
  rectangle net COM: 202.705,30.353 211.341,35.814
  rectangle net PGND: 160.922,77.851 164.478,86.868
  region net GT3: 154.017,58.715 158.731,62.815 155.231,66.84 150.517,62.741
  rectangle net GT3: 156.223,60.706 172.415,68.77
  rectangle net VS: 145.504,4.572 149.746,8.255
  rectangle net 16V: 31.382,19.304 39.129,30.353
  rectangle net GND: 14.618,23.114 17.412,36.83
  rectangle net NetJP1_1: 6.871,54.737 11.111,61.771
  region net PGND: 107.117,84.216 112.535,80.29 115.23,84.009 109.812,87.935
  rectangle net DRN2: 70.498,45.72 90.564,53.086
  rectangle net NetC1_1: 98.819,26.797 107.963,31.623
  rectangle net NetC2_1: 123.965,29.337 131.331,43.307
  rectangle net COM: 148.476,26.543 150.889,37.211
  rectangle net COM: 148.603,35.56 150.889,47.879
  rectangle net COM: 206.515,33.401 213.129,49.667
  rectangle net NetF1_2: 193.434,17.018 206.515,23.114
  rectangle net COM: 185.687,6.731 208.039,9.398
  rectangle net HV: 61.354,22.987 88.659,38.354
  rectangle net PGND: 179.845,77.47 185.306,85.725
  rectangle net HV: 181.496,57.15 205.499,60.198
  rectangle net NetF1_1: 188.608,35.052 193.561,48.288
  rectangle net HV: 130.569,2.921 137.554,21.971
  rectangle net HV: 62.37,25.908 69.482,31.465
  rectangle net GND: 41.288,60.96 51.575,63.881
  rectangle net GND: 10.173,111.125 16.523,120.777
  rectangle net GND: 10.046,119.507 38.748,123.556
  rectangle net GND: 39.129,110.363 50.686,122.912
  rectangle net PGND: 74.181,111.633 87.389,123.19
  rectangle net PGND: 108.344,110.236 121.425,120.523
  rectangle net PGND: 146.698,110.617 157.239,120.523
  rectangle net PGND: 180.099,110.617 192.545,122.047
  rectangle net HV: 159.779,23.622 180.988,54.102
  rectangle net HV: 138.062,6.731 140.729,54.102
  rectangle net HV: 57.544,2.667 61.735,59.817
  rectangle net GND: 14.11,5.588 23,23.241
  rectangle net GND: 45.479,5.461 51.448,62.357
  rectangle net GND: 51.956,67.183 57.544,87.122
  rectangle net NetQ1a_1: 9.919,74.93 13.475,79.629
  rectangle net NetQ1a_1: 7.633,77.978 14.364,104.902
  rectangle net NetQ1a_1: 5.22,70.612 8.429,105.791
  text "MCPS Power 030524" at 214.168,61.006 h1.52 r270

## Silkscreen, mask and mechanical layers (free items; w line width, h text height)
Top Overlay:
  lines w0.254: 118.758,86.36 124.6,92.202
  lines w0.4: 27.318,95.504 50.813,95.504 ; 91.326,9.271 91.326,44.831 ; 97.676,95.123 122.06,95.123 ; 118.758,64.897 118.758,86.36 ; 178.956,88.392 178.956,108.839 ; 202.197,92.329 202.197,102.489
  lines w0.5: 45.098,115.951 47.625,113.424 47.625,89.662 ; 47.625,80.01 47.625,45.439 47.625,30.928 47.625,30.928 47.625,3.429 49.149,1.905 161.036,1.905 168.719,9.588 171.336,9.588
  text "G" at 30.41,109.518 h2
  text "G" at 100.656,109.518 h2
  text "G" at 65.533,109.493 h2
  text "G" at 135.779,109.493 h2
  text "G" at 135.779,109.493 h2
  text "G" at 206.026,109.493 h2
  text "G" at 100.656,109.468 h2
  text "G" at 170.903,109.468 h2
  text "S" at 85.91,103.538 h2
  text "S" at 121.034,103.538 h2
  text "S" at 15.664,103.512 h2
  text "S" at 50.787,103.512 h2
  text "S" at 156.157,103.512 h2
  text "S" at 191.28,103.512 h2
  text "D" at 90.999,103.422 h2
  text "D" at 126.122,103.422 h2
  text "D" at 20.753,103.397 h2
  text "D" at 55.876,103.397 h2
  text "D" at 161.245,103.397 h2
  text "D" at 196.368,103.397 h2
Mechanical 1:
  the board outline again, w0.254

## Text inside footprints (layer, text, board x,y; h text height)
CE1: Top Overlay "+" at 38.354,13.462 h2 r270
CE2: Top Overlay "+" at 159.423,24.13 h2 r180
D1: Top Overlay "K" at 97.549,44.196 h1.02; Top Overlay "A" at 97.422,52.07 h1.02
D2: Top Overlay "A" at 130.696,60.452 h1.02 r270; Top Overlay "K" at 122.822,60.325 h1.02 r270
D3: Top Overlay "K" at 98.692,59.817 h1.02 r90; Top Overlay "A" at 90.818,59.69 h1.02 r90
D4: Top Overlay "K" at 159.017,48.514 h1.02 r90; Top Overlay "A" at 151.143,48.387 h1.02 r90
JP1: Top Overlay "2" at 6.363,51.181 h0.91 r270; Top Overlay "1" at 6.363,54.991 h0.91 r270
JP4: Top Overlay "1" at 7.76,32.08 h0.91 r270; Top Overlay "2" at 7.76,28.27 h0.91 r270; Top Overlay "3" at 7.76,24.206 h0.91 r270
JP5: Top Overlay "3" at 157.62,8.255 h0.91 r180; Top Overlay "2" at 153.861,7.874 h0.91; Top Overlay "1" at 150.05,7.874 h0.91
Q1: Top Overlay "B" at 26.302,59.69 h0.9; Top Overlay "E" at 28.842,59.69 h0.9; Top Overlay "C" at 23.635,59.69 h0.9
Q2: Top Overlay "B" at 39.891,65.024 h0.9 r180; Top Overlay "E" at 37.351,65.024 h0.9 r180; Top Overlay "C" at 42.558,65.024 h0.9 r180
Z1: Top Overlay "2" at 29.858,23.622 h1.02; Top Overlay "1" at 17.285,23.622 h1.02
Z1a: Top Overlay "2" at 9.411,84.201 h1.02 r180; Top Overlay "1" at 21.984,84.201 h1.02 r180
Z1b: Top Overlay "2" at 45.352,87.503 h1.02 r180; Top Overlay "1" at 57.925,87.503 h1.02 r180
Z1c: Top Overlay "1" at 88.786,87.503 h1.02 r180; Top Overlay "2" at 76.213,87.503 h1.02 r180
Z1d: Top Overlay "2" at 127.521,80.899 h1.02; Top Overlay "1" at 114.948,80.899 h1.02
Z1e: Top Overlay "2" at 147.46,87.503 h1.02 r180; Top Overlay "1" at 160.033,87.503 h1.02 r180
Z1f: Top Overlay "2" at 197.752,81.153 h1.02; Top Overlay "1" at 185.179,81.153 h1.02
Z2: Top Overlay "2" at 29.858,30.734 h1.02; Top Overlay "1" at 17.285,30.734 h1.02
Z2a: Top Overlay "2" at 9.411,88.646 h1.02 r180; Top Overlay "1" at 21.984,88.646 h1.02 r180
Z2b: Top Overlay "2" at 45.352,83.185 h1.02 r180; Top Overlay "1" at 57.925,83.185 h1.02 r180
Z2c: Top Overlay "1" at 88.786,83.312 h1.02 r180; Top Overlay "2" at 76.213,83.312 h1.02 r180
Z2d: Top Overlay "2" at 127.521,85.471 h1.02; Top Overlay "1" at 114.948,85.471 h1.02
Z2e: Top Overlay "2" at 147.46,83.312 h1.02 r180; Top Overlay "1" at 160.033,83.312 h1.02 r180
Z2f: Top Overlay "2" at 197.752,85.344 h1.02; Top Overlay "1" at 185.179,85.344 h1.02